# Altium PCB CH32H417MEU6-UHSIF-Bottom-R0.PcbDoc (part 2 of 2)
Units mm, origin at the board's own origin, x right, y up, seen from the top; angles counter-clockwise.
Board outline 65 x 45 mm, 4 copper layers (Top Layer, Layer 1, Layer 2, Bottom Layer), stack 0.603 mm thick; 56 components, 86 nets, 278 pads, 436 vias.
Unrouted connection lines stored in the file: 33.
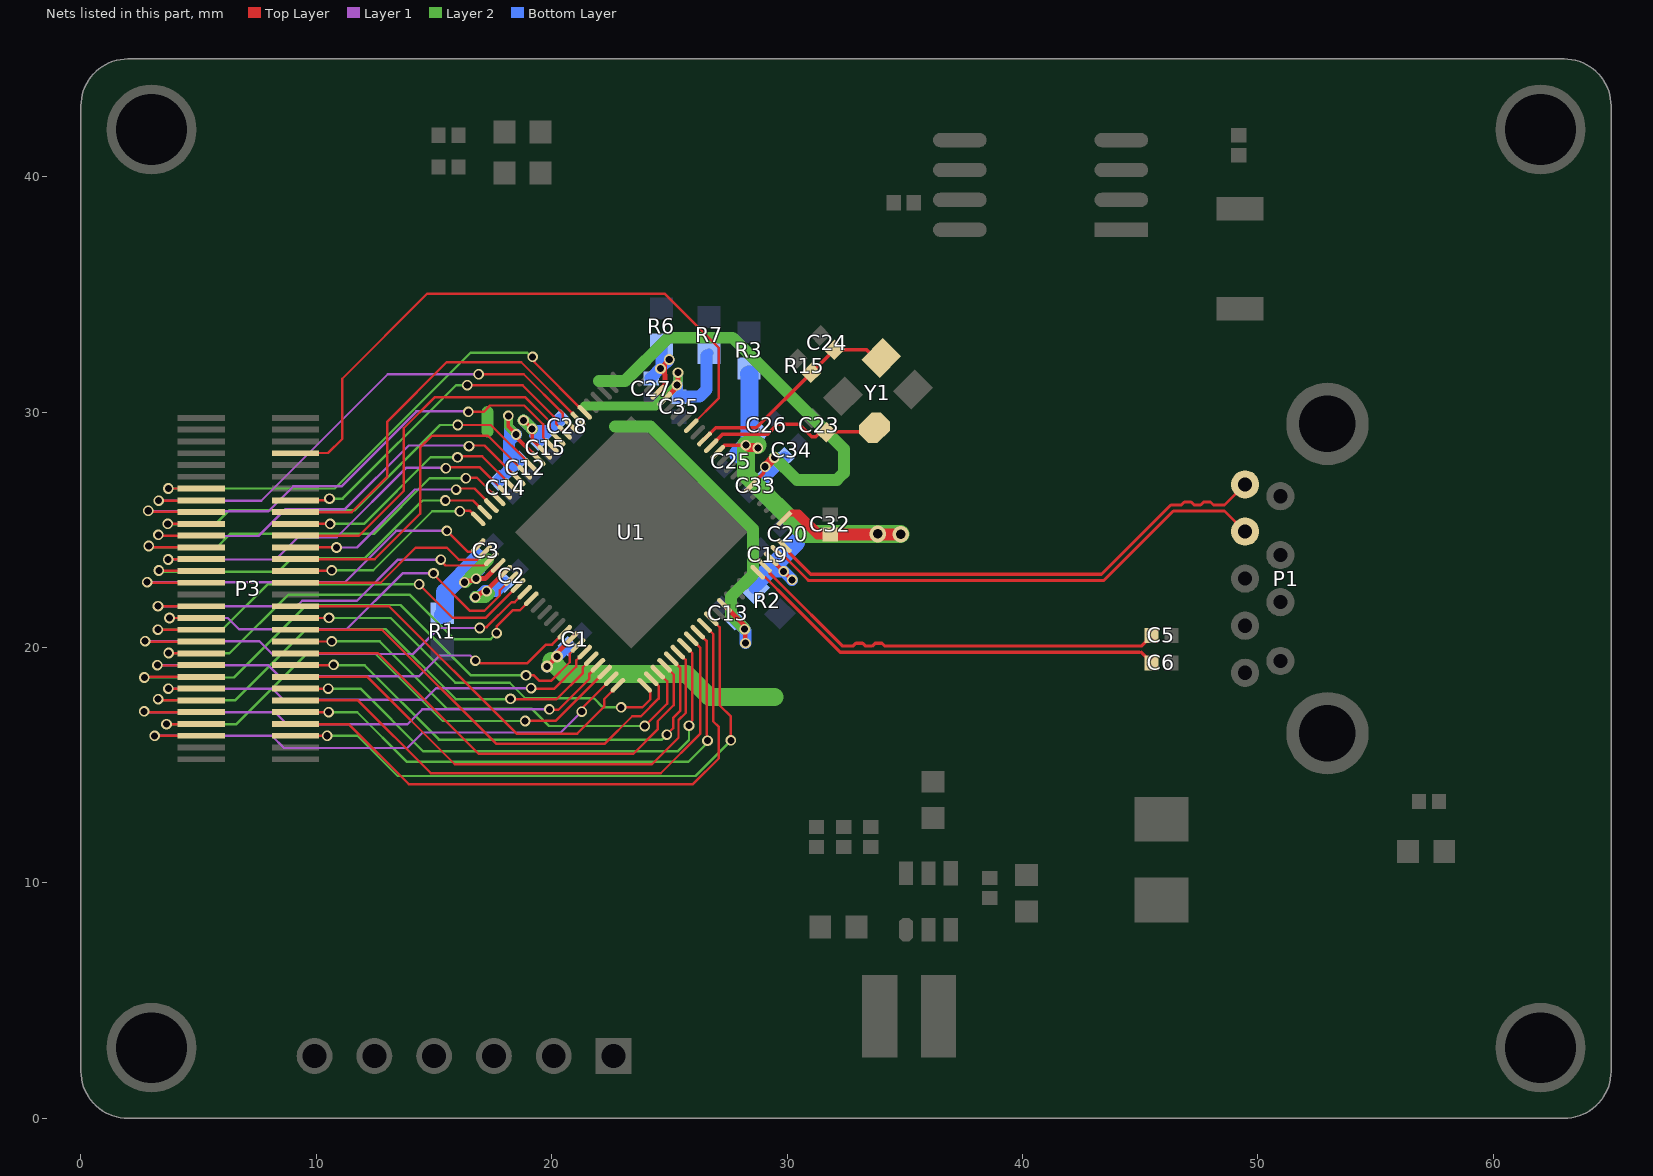
[diagram p4: the nets of this part, all layers, seen from the top]

## Via types
v1: diameter 0.45, hole 0.3, Top Layer to Bottom Layer, tented both sides, 329 vias
v2: diameter 0.5, hole 0.3, Top Layer to Bottom Layer, tented both sides, 85 vias
v3: diameter 0.6, hole 0.3, Top Layer to Bottom Layer, tented both sides, 12 vias
v4: diameter 0.711, hole 0.406, Top Layer to Bottom Layer, tented both sides, 10 vias

## Nets (pads, with @x,y where several pads share a name; then routed paths per layer and width w, separated by ;. In a path a pad name is that pad's centre, name@x,y a point inside that pad or via, vN(x,y) a via of type N, cw(c..) or ccw(c..) an arc to the next point about the centre after c; other vN are vias at no path point) (continued)
UFP7: P3.13 U1.28 | length 22.6
  Top Layer w0.102: v1(3.714,26.75) P3.13@5.112,26.75 ; v1(19.188,32.34) 19.255,32.274 19.255,32.129 U1.28@21.398,29.986
  Layer 2 w0.102: v1(3.714,26.75) 10.785,26.75 16.551,32.516 18.955,32.516 19.131,32.34 v1(19.188,32.34)
UFP8: P3.18 U1.29 | length 17
  Top Layer w0.102: P3.18@9.112,25.75 11.508,25.75 13.017,27.259 13.017,29.596 15.534,32.113 18.706,32.113 U1.29@21.115,29.703
UFP9: P3.15 U1.30 | length 22.6
  Top Layer w0.102: v1(3.304,26.237) 5.099,26.237 P3.15@5.112,26.25 ; v1(16.894,31.604) 18.809,31.604 20.475,29.939 20.475,29.778 U1.30@20.833,29.42
  Layer 1 w0.102: v1(3.304,26.237) 3.311,26.23 7.659,26.23 13.034,31.604 v1(16.894,31.604)
UFP10: P3.16 U1.31 | length 14.4
  Top Layer w0.102: P3.16@9.112,26.25 10.315,26.25 10.32,26.255 10.495,26.255 v1(10.561,26.322) ; v1(16.411,31.141) 18.762,31.141 20.195,29.707 20.195,29.492 U1.31@20.55,29.137
  Layer 2 w0.102: v1(10.561,26.322) 11.119,26.322 15.938,31.141 v1(16.411,31.141)
UFP11: P3.22 U1.32 | length 16.1
  Top Layer w0.102: P3.22@9.112,24.75 9.118,24.744 11.814,24.744 13.714,26.644 13.714,29.31 15.026,30.622 18.885,30.622 19.916,29.591 19.916,29.206 U1.32@20.267,28.855
UFP12: P3.17 U1.33 | length 22.3
  Top Layer w0.102: v1(2.862,25.807) 2.912,25.757 P3.17@5.105,25.757 ; v1(16.459,30.008) 17.111,30.008 17.382,30.279 18.833,30.279 19.636,29.476 19.636,28.919 U1.33@19.984,28.572
  Layer 1 w0.102: v1(2.862,25.807) 2.889,25.779 7.957,25.779 9.021,26.844 11.066,26.844 14.25,30.027 16.44,30.027 v1(16.459,30.008)
UFP13: P3.19 U1.36 | length 19.3
  Top Layer w0.102: v1(3.689,25.248) 3.691,25.25 P3.19@5.112,25.25 ; v1(16.006,29.449) 17.41,29.449 U1.36@19.136,27.723
  Layer 2 w0.102: v1(3.689,25.248) 3.714,25.223 5.695,25.223 6.307,25.835 11.642,25.835 15.256,29.449 v1(16.006,29.449)
UFP14: P3.26 U1.37 | length 14.2
  Top Layer w0.102: P3.26@9.112,23.75 12.48,23.75 14.41,25.681 14.41,28.486 14.92,28.996 17.286,28.996 18.842,27.44 U1.37@18.853,27.44
UFP15: P3.21 U1.38 | length 19.3
  Top Layer w0.102: v1(3.292,24.782) 3.324,24.75 P3.21@5.112,24.75 ; v1(16.487,28.548) 16.518,28.579 17.149,28.579 U1.38@18.57,27.158
  Layer 1 w0.102: v1(3.292,24.782) 3.339,24.735 7.545,24.735 8.688,25.878 11.225,25.878 13.926,28.579 16.457,28.579 v1(16.487,28.548)
UFP16: P3.20 U1.39 | length 10.9
  Top Layer w0.102: P3.20@9.112,25.25 v1(10.588,25.25) ; v1(15.998,28.076) 16.042,28.12 17.042,28.12 U1.39@18.287,26.875
  Layer 2 w0.102: v1(10.588,25.25) 12.022,25.25 14.849,28.076 v1(15.998,28.076)
UFP17: P3.25 U1.40 | length 17.8
  Top Layer w0.102: v1(3.707,23.735) 3.721,23.75 P3.25@5.112,23.75 ; v1(15.505,27.612) 15.538,27.646 16.95,27.646 U1.40@18.004,26.592
  Layer 1 w0.102: v1(3.707,23.735) 8.279,23.735 9.221,24.678 10.865,24.678 13.829,27.641 15.476,27.641 v1(15.505,27.612)
UFP18: P3.23 U1.41 | length 18.7
  Top Layer w0.102: v1(2.881,24.309) 2.926,24.264 5.098,24.264 P3.23@5.112,24.25 ; v1(16.354,27.188) 16.373,27.206 16.824,27.206 U1.41@17.721,26.309
  Layer 2 w0.102: v1(2.881,24.309) 2.94,24.25 5.768,24.25 6.339,24.821 12.451,24.821 14.814,27.184 15.682,27.184 15.685,27.188 v1(16.354,27.188)
UFP19: P3.24 U1.42 | length 9.7
  Top Layer w0.102: P3.24@9.112,24.25 10.852,24.25 v1(10.856,24.246) ; v1(15.938,26.707) 15.981,26.75 16.715,26.75 U1.42@17.439,26.026
  Layer 1 w0.102: v1(10.856,24.246) 11.721,24.246 14.183,26.707 v1(15.938,26.707)
UFP20: P3.27 U1.43 | length 17.1
  Top Layer w0.102: v1(3.313,23.269) 3.332,23.25 P3.27@5.112,23.25 ; v1(15.479,26.244) 16.655,26.244 U1.43@17.156,25.743
  Layer 2 w0.102: v1(3.313,23.269) 3.373,23.209 8.371,23.209 8.963,23.801 12.061,23.801 14.504,26.244 v1(15.479,26.244)
UFP21: P3.28 U1.44 | length 9
  Top Layer w0.102: P3.28@9.112,23.25 9.126,23.264 10.643,23.264 v1(10.656,23.277) ; v1(16.101,25.784) 16.116,25.799 16.534,25.799 U1.44@16.873,25.46
  Layer 2 w0.102: v1(10.656,23.277) 12.418,23.277 14.925,25.784 v1(16.101,25.784)
UFP22: P3.29 U1.45 | length 17.8
  Top Layer w0.102: v1(2.811,22.773) 2.833,22.75 P3.29@5.112,22.75 ; v1(15.544,24.953) 16.44,24.058 16.575,24.058 16.846,24.329 U1.45@16.873,24.329
  Layer 1 w0.102: v1(2.811,22.773) 2.818,22.765 11.209,22.765 13.397,24.953 v1(15.544,24.953)
UFP23: P3.30 U1.46 | length 9
  Top Layer w0.102: P3.30@9.112,22.75 12.737,22.75 14.219,24.232 15.547,24.232 16.056,23.723 16.833,23.723 U1.46@17.156,24.046
UFP24: P3.33 U1.47 | length 17.1
  Top Layer w0.102: v1(3.273,21.756) 3.278,21.75 P3.33@5.112,21.75 ; v1(15.292,23.733) 15.292,23.677 15.489,23.481 17.129,23.481 17.412,23.763 U1.47@17.439,23.763
  Layer 1 w0.102: v1(3.273,21.756) 9.169,21.756 9.4,21.986 11.724,21.986 13.471,23.733 v1(15.292,23.733)
UFP25: P3.35 U1.50 | length 18.4
  Top Layer w0.102: v1(3.762,21.25) P3.35@5.112,21.25 ; v1(14.978,23.148) 14.978,23.107 16.533,21.553 17.134,21.553 17.8,22.219 17.8,22.427 U1.50@18.287,22.915
  Layer 1 w0.102: v1(3.762,21.25) 6.238,21.25 6.719,20.77 11.289,20.77 13.667,23.148 v1(14.978,23.148)
UFP26: P3.37 U1.51 | length 19.1
  Top Layer w0.102: v1(3.266,20.759) 3.275,20.75 P3.37@5.112,20.75 ; v1(14.367,22.685) 15.796,21.256 17.194,21.256 18.079,22.141 U1.51@18.57,22.632
  Layer 2 w0.102: v1(3.266,20.759) 3.275,20.75 5.999,20.75 7.927,22.678 14.361,22.678 v1(14.367,22.685)
UFP27: P3.39 U1.52 | length 19.8
  Top Layer w0.102: v1(2.729,20.268) 2.747,20.25 P3.39@5.112,20.25 ; v1(16.941,20.825) 16.979,20.863 17.234,20.863 18.291,21.919 18.423,21.919 U1.52@18.853,22.349
  Layer 1 w0.102: v1(2.729,20.268) 7.578,20.268 8.126,19.72 14.104,19.72 15.209,20.825 v1(16.941,20.825)
UFP28: P3.41 U1.53 | length 19.5
  Top Layer w0.102: v1(3.728,19.764) 3.742,19.75 P3.41@5.112,19.75 ; v1(17.659,20.609) 17.671,20.621 17.671,20.905 18.339,21.573 18.642,21.573 U1.53@19.136,22.066
  Layer 2 w0.102: v1(3.728,19.764) 3.742,19.75 6.31,19.75 8.795,22.234 13.981,22.234 15.859,20.356 17.406,20.356 v1(17.659,20.609)
UFP29: P3.43 U1.58 | length 20.4
  Top Layer w0.102: v1(3.249,19.246) 3.263,19.232 5.094,19.232 P3.43@5.112,19.25 ; v1(16.757,19.441) 16.843,19.441 16.962,19.321 18.951,19.321 19.749,20.12 20.017,20.12 U1.58@20.55,20.652
  Layer 1 w0.102: v1(3.249,19.246) 3.253,19.25 7.954,19.25 8.433,18.772 14.354,18.772 15.241,19.658 16.54,19.658 v1(16.757,19.441)
UFP30: P3.45 U1.60 | length 24.3
  Top Layer w0.102: v1(2.694,18.723) 2.721,18.75 P3.45@5.112,18.75 ; v1(18.906,18.815) 19.245,18.815 19.482,18.577 19.973,18.577 20.763,19.367 20.763,19.734 U1.60@21.115,20.086
  Layer 2 w0.102: v1(2.694,18.723) 6.501,18.723 9.581,21.804 13.577,21.804 16.566,18.815 v1(18.906,18.815)
UFP31: P3.47 U1.61 | length 20.3
  Top Layer w0.102: v1(3.715,18.253) 3.718,18.25 P3.47@5.112,18.25 ; v1(19.122,18.268) 19.149,18.242 20.101,18.242 21.043,19.183 21.043,19.448 U1.61@21.398,19.804
  Layer 1 w0.102: v1(3.715,18.253) 3.719,18.249 8.135,18.249 8.603,17.781 14.597,17.781 15.084,18.268 v1(19.122,18.268)
UFP32: P3.49 U1.62 | length 23.6
  Top Layer w0.102: v1(3.279,17.801) 3.33,17.75 P3.49@5.112,17.75 ; v1(18.248,17.816) 18.264,17.8 20.201,17.8 21.322,18.921 21.322,19.162 U1.62@21.681,19.521
  Layer 2 w0.102: v1(3.279,17.801) 3.33,17.75 6.551,17.75 9.585,20.785 12.946,20.785 15.931,17.8 18.232,17.8 v1(18.248,17.816)
UFP33: P3.51 U1.63 | length 23.1
  Top Layer w0.102: v1(2.687,17.283) 2.72,17.25 P3.51@5.112,17.25 ; v1(19.898,17.369) 19.913,17.353 20.287,17.353 21.602,18.667 21.602,18.875 U1.63@21.964,19.238
  Layer 1 w0.102: v1(2.687,17.283) 2.72,17.25 8.242,17.25 8.763,16.729 13.86,16.729 14.499,17.369 v1(19.898,17.369)
UFP34: P3.53 U1.64 | length 23.4
  Top Layer w0.102: v1(3.636,16.743) 5.105,16.743 P3.53@5.112,16.75 ; v1(18.871,16.874) 18.888,16.891 20.183,16.891 U1.64@22.247,18.955
  Layer 2 w0.102: v1(3.636,16.743) 6.609,16.743 9.606,19.74 12.502,19.74 15.369,16.874 v1(18.871,16.874)
UFP35: P3.55 U1.65 | length 22.9
  Top Layer w0.102: v1(3.131,16.247) 3.134,16.25 P3.55@5.112,16.25 ; v1(21.274,17.276) 21.341,17.342 21.341,17.463 22.53,18.652 U1.65@22.53,18.672
  Layer 1 w0.102: v1(3.131,16.247) 8.105,16.247 8.621,15.731 13.864,15.731 14.52,16.386 20.384,16.386 v1(21.274,17.276)
UFP36: P3.34 U1.66 | length 17
  Top Layer w0.102: P3.34@9.112,21.75 13.093,21.75 18.505,16.337 21.082,16.337 22.23,17.486 22.23,17.807 U1.66@22.813,18.389
UFP37: P3.36 U1.67 | length 17.5
  Top Layer w0.102: P3.36@9.112,21.25 9.114,21.252 v1(10.537,21.253) v1(10.537,21.253) ; v1(22.946,17.455) 23.843,17.455 24.189,17.801 24.189,18.074 24.175,18.089 24.175,18.158 U1.67@23.944,18.389
  Layer 2 w0.102: v1(10.537,21.253) 10.54,21.25 13.16,21.25 15.909,18.501 18.217,18.501 18.877,17.84 21.79,17.84 22.175,17.455 v1(22.946,17.455)
UFP38: P3.38 U1.68 | length 19.2
  Top Layer w0.102: P3.38@9.112,20.75 12.796,20.75 17.632,15.914 22.261,15.914 23.423,17.076 23.787,17.076 24.54,17.829 24.54,18.359 U1.68@24.227,18.672
UFP39: P3.40 U1.69 | length 19.2
  Top Layer w0.102: P3.40@9.112,20.25 9.116,20.254 10.651,20.254 v1(10.655,20.257) ; v1(23.952,16.662) 24.905,17.615 24.905,18.56 U1.69@24.51,18.955
  Layer 2 w0.102: v1(10.655,20.257) 12.691,20.257 15.561,17.387 19.161,17.387 19.886,16.662 v1(23.952,16.662)
UFP40: P3.42 U1.70 | length 20.8
  Top Layer w0.102: P3.42@9.112,19.75 12.622,19.75 16.888,15.483 23.468,15.483 24.499,16.514 24.499,16.863 25.184,17.548 25.184,18.846 U1.70@24.792,19.238
UFP41: P3.44 U1.71 | length 20.8
  Top Layer w0.102: P3.44@9.112,19.25 10.723,19.25 v1(10.735,19.261) ; v1(24.888,16.296) 25.157,16.565 25.157,17.009 25.464,17.316 25.464,19.133 U1.71@25.075,19.521
  Layer 2 w0.102: v1(10.735,19.261) 10.754,19.242 12.052,19.242 15.208,16.087 24.678,16.087 v1(24.888,16.296)
UFP42: P3.46 U1.72 | length 22.2
  Top Layer w0.102: P3.46@9.112,18.75 12.171,18.75 15.883,15.038 24.26,15.038 25.386,16.164 25.386,16.915 25.692,17.221 25.692,19.47 U1.72@25.358,19.804
UFP43: P3.48 U1.73 | length 22.3
  Top Layer w0.102: P3.48@9.126,18.236 P3.48@9.112,18.25 v1(10.505,18.25) ; U1.73@25.641,20.086 25.974,19.753 25.974,16.909 25.829,16.764 v1(25.829,16.675)
  Layer 2 w0.102: v1(10.505,18.25) 11.875,18.25 14.54,15.585 25.342,15.585 25.829,16.072 v1(25.829,16.675)
UFP44: P3.50 U1.74 | length 23.4
  Top Layer w0.102: P3.50@9.112,17.75 11.771,17.75 14.865,14.656 24.628,14.656 26.302,16.329 26.302,19.991 U1.74@25.924,20.369
UFP45: P3.52 U1.75 | length 23.6
  Top Layer w0.102: P3.52@9.114,17.252 P3.52@9.112,17.25 v1(10.525,17.25) ; U1.75@26.207,20.652 26.581,20.278 26.581,16.077 v1(26.619,16.039)
  Layer 2 w0.102: v1(10.525,17.25) 11.737,17.25 13.851,15.136 25.801,15.136 26.619,15.953 v1(26.619,16.039)
UFP46: P3.54 U1.76 | length 25.4
  Top Layer w0.102: P3.54@9.112,16.75 P3.54@9.114,16.748 ; P3.54@9.114,16.733 11.388,16.733 13.928,14.192 25.998,14.192 27.099,15.293 27.099,16.614 26.861,16.852 26.861,20.564 U1.76@26.489,20.935
UFP47: P3.56 U1.77 | length 25.4
  Top Layer w0.102: P3.56@9.112,16.25 v1(10.457,16.25) ; U1.77@26.772,21.218 27.14,20.85 27.14,17.535 27.612,17.063 v1(27.612,16.049)
  Layer 2 w0.102: v1(10.457,16.25) 11.749,16.25 13.46,14.539 26.101,14.539 v1(27.612,16.049)
UFPCLK: P3.8 U1.15 | length 27
  Top Layer w0.102: P3.8@9.112,28.25 9.123,28.261 10.503,28.261 11.102,28.86 11.102,31.416 14.715,35.03 24.784,35.03 27.099,32.715 27.099,30.596 U1.15@25.924,29.42
USB_SSRX_n: P1.6 U1.87 | length 21.9
  Top Layer w0.13: U1.87@29.601,24.046 29.826,23.821 29.928,23.821 30.821,22.927 30.896,22.852 43.459,22.852 46.402,25.796 48.58,25.796 P1.6@49.452,24.924
USB_SSRX_p: P1.5 U1.88 | length 21.9
  Top Layer w0.13: U1.88@29.884,24.329 30.109,24.103 30.109,24.002 31.003,23.109 43.353,23.109 46.296,26.052 46.744,26.052 46.871,26.178 47.163,26.178 47.29,26.052 47.567,26.052 47.693,26.178 47.986,26.178 48.112,26.052 48.58,26.052 P1.5@49.452,26.924
USB_SSTX_n: C6.1 U1.84 | length 18.3
  Top Layer w0.13: U1.84@28.752,23.198 28.978,22.972 29.079,22.972 29.55,22.502 29.603,22.448 32.256,19.796 44.97,19.796 ; 45.045,19.796 45.476,19.365 C6.1@45.476,19.34
USB_SSTX_p: C5.1 U1.85 | length 18.3
  Top Layer w0.13: U1.85@29.035,23.481 29.261,23.255 29.261,23.154 29.656,22.758 32.362,20.052 32.791,20.052 32.918,20.178 33.21,20.178 33.337,20.052 33.614,20.052 33.74,20.178 34.033,20.178 34.159,20.052 45.042,20.052 ; 45.045,20.052 45.476,20.483 C5.1@45.476,20.508
VDD12A: C19.2 C20.2 R2.1 U1.86 | length 5.8
  Top Layer w0.178: U1.86@29.318,23.763 v1(29.853,23.229) v1(30.212,22.87)
  Bottom Layer w0.508: R2.1@28.608,22.518 R2.1@28.608,22.787 ; 29.067,23.139 29.157,23.229 v1(29.853,23.229) ; C19.2@29.466,23.646 29.418,23.598 29.483,23.598 v1(29.853,23.229) ; v1(30.212,22.87) v1(29.853,23.229)
  Bottom Layer w0.762: R2.1@28.662,22.734 29.067,23.139 ; 29.157,23.229 C19.2@29.472,23.544 ; C19.2@29.52,23.592 C20.2@30.383,24.455
VDD33: C1.1 C25.2 C26.2 C32.2 R3.1 U1.1 U1.11 U1.59 | length 37
  Top Layer w0.152: U1.11@27.055,28.289 27.362,28.596 v1(28.244,28.596)
  Top Layer w0.203: v2@19.833,19.251 19.857,19.251 v2(20.22,19.615) ; U1.59@20.833,20.369 20.277,19.814 v2@20.277,19.588 ; C32.2@31.543,24.691 31.267,24.691 30.288,25.67 ; C32.2@31.595,24.954 31.332,24.954 30.518,25.768 30.194,25.768 U1.1@30.096,25.67 ; C32.2@31.829,24.804 31.331,24.804 30.464,25.67 30.288,25.67 ; v2@20.276,19.587 v2@20.277,19.588 ; U1.1@30.096,25.67 30.288,25.67 ; U1.1@30.096,25.67 30.093,25.67 U1.1@29.884,25.46 29.886,25.46 U1.1@30.096,25.67
  Top Layer w0.381: v1(28.244,28.596) 28.263,28.596 28.375,28.484 28.743,28.484 v1(28.756,28.47)
  Top Layer w0.508: C32.2@31.829,24.804 32.998,24.804 34.82,24.804 v4(34.826,24.81)
  Layer 2 w0.762: 19.985,19.425 20.532,18.878 25.721,18.878 26.703,17.896 29.466,17.896 ; v1@28.744,28.596 v1(28.244,28.596) 28.244,27.351 30.773,24.821 v4(33.847,24.821) v4@34.812,24.821
  Bottom Layer w0.508: v2(19.796,19.19) 20.652,20.047 C1.1@20.692,20.047
  Bottom Layer w0.762: C25.2@27.919,28.217 28.405,28.703 28.405,31.588 R3.1@28.387,31.606
VDD33A: C27.2 R6.1 U1.20 | length 4.4
  Top Layer w0.203: U1.20@24.51,30.834 24.811,31.136 24.811,31.587 24.791,31.607 ; 24.791,32.012 24.791,31.607 ; v1@24.978,32.313 24.978,32.223 24.621,31.866 v1(24.621,31.843) 24.621,31.776 24.791,31.607
  Bottom Layer w0.508: C27.2@24.202,31.442 v1@24.659,31.9 ; v1(24.621,31.843) 24.659,31.881 v1@24.659,31.9 ; R6.1@24.659,32.864 v1@24.659,31.9 ; v1@24.966,32.207 v1@24.659,31.9
  other v1: 24.991,32.232
VDDIO: C12.1 C14.1 C35.2 R7.1 U1.19 U1.35 | length 19.3
  Top Layer w0.152: v1(18.155,29.839) 18.155,29.382 18.488,29.049 v1(18.488,29.046) ; v1@18.489,29.047 18.546,28.99 18.546,28.878 U1.35@19.418,28.006
  Top Layer w0.203: U1.19@25.003,30.763 25.325,31.084 25.325,31.176 25.372,31.224 25.369,31.227 25.369,31.673 v1(25.365,31.677)
  Layer 2 w0.381: v1(18.155,29.839) 18.168,29.826 18.168,29.605 18.168,29.384 18.488,29.064 v1(18.488,29.046) ; 21.397,30.258 24.407,30.258 25.372,31.223 25.369,31.227 25.369,31.673 v1(25.365,31.677)
  Bottom Layer w0.381: v1(18.155,29.839) 18.168,29.826 18.168,29.384 ; 18.192,28.33 18.168,28.354 18.168,29.384 ; v1(18.488,29.046) 18.488,29.064 18.168,29.384 ; v1@25.365,31.07 v1(25.365,31.677) ; v1@25.372,31.223 25.385,31.21 25.385,30.673 C35.2@25.408,30.651 ; R7.1@26.576,32.394 R7.1@26.685,32.503
  Bottom Layer w0.508: v1(18.488,29.046) 18.192,28.75 18.192,28.33 ; C35.2@25.408,30.651 26.278,30.651 26.576,30.949 R7.1@26.576,32.394 ; 18.192,28.33 18.192,27.526 C14.1@17.756,27.089 C12.1@18.594,27.928 18.192,28.33
  other v1: 25.321,31.147
VDDK: C3.2 C33.2 C34.2 R1.1 U1.6 U1.48 | length 28.3
  Top Layer w0.152: U1.6@28.469,26.875 29.007,27.413 29.007,27.618 v1(29.064,27.675)
  Top Layer w0.203: v1@16.344,22.787 16.391,22.834 16.635,22.834 16.724,22.924 v1(16.791,22.924) 17.165,22.924 U1.48@17.721,23.481
  Top Layer w0.381: v1(29.064,27.675) v1(29.459,28.07)
  Layer 2 w0.508: v1@16.344,22.787 16.636,23.079 17.292,23.735 ; 17.265,29.164 17.265,29.459 17.265,29.993 ; 22.004,31.318 23.113,31.318 24.951,33.156 27.687,33.156 32.413,28.43 32.413,27.415 32.115,27.118 30.411,27.118 v1(29.459,28.07)
  Bottom Layer w0.508: v1@16.66,23.055 16.924,23.318 16.924,23.714 16.942,23.732 16.942,23.797 C3.2@16.924,23.815 ; C33.2@28.972,27.163 C34.2@29.887,28.078
  Bottom Layer w0.762: R1.1@15.375,21.367 15.457,21.448 15.457,22.348 C3.2@16.888,23.779
  other v1: 16.29,22.769
VIO18: C2.1 C13.1 C15.2 C28.2 U1.34 U1.49 U1.79 | length 25
  Top Layer w0.152: v1(18.801,29.647) 18.804,29.647 19.167,29.285 v1(19.17,29.285) 19.17,28.82 U1.34@19.701,28.289
  Top Layer w0.203: v1(16.758,22.136) 16.825,22.136 17.034,22.345 17.184,22.345 v1(17.231,22.393) 17.231,22.422 18.004,23.195 U1.49@18.004,23.198 ; U1.79@27.338,21.784 v1@28.15,20.972 ; v1(28.197,20.781) 28.15,20.828 v1@28.15,20.972 ; v1(28.232,20.18) 28.22,20.193 28.22,20.902 v1@28.15,20.972
  Layer 2 w0.508: v1(16.758,22.136) 17.181,22.136 v1@17.334,22.29 ; v1(18.801,29.647) 18.807,29.647 v1(19.17,29.285) ; 22.683,29.378 24.198,29.378 28.55,25.026 28.55,23.087 27.61,22.147 27.61,21.368 v1(28.197,20.781)
  Bottom Layer w0.508: v1(16.758,22.136) 16.903,22.136 17.16,22.393 v1(17.231,22.393) 17.643,22.393 C2.1@17.994,22.744 ; v1(18.801,29.647) 18.982,29.466 18.989,29.466 v1(19.17,29.285) v1@19.257,29.198 ; C15.2@19.449,28.782 C15.2@19.466,28.8 ; C28.2@20.355,29.689 19.865,29.198 ; C13.1@27.802,21.158 v1@28.18,20.781 ; v1(28.197,20.781) v1@28.18,20.781 ; v1(28.232,20.18) 28.232,20.729 28.188,20.772 v1@28.18,20.781 ; v1@19.257,29.198 19.865,29.198 ; v1@19.257,29.198 19.296,29.159 19.296,29.035 19.466,28.865 C15.2@19.466,28.8 ; C15.2@19.466,28.8 19.865,29.198
XI: C23.2 U1.12 Y1.1 | length 7.7
  Top Layer w0.152: U1.12@26.772,28.572 27.25,29.049 29.15,29.049 29.582,29.481 30.519,29.481 31.048,28.951 31.214,28.951 31.358,29.096 31.507,29.096 31.566,29.155 33.542,29.155 Y1.1@33.716,29.329
XO: C24.2 R15.2 U1.13 Y1.3 | length 9.2
  Top Layer w0.152: U1.13@26.489,28.855 26.964,29.329 28.694,29.329 R15.2@31.026,31.66 C24.2@32.014,32.648 32.031,32.666 32.348,32.666 32.365,32.648 33.374,32.648 33.723,32.299 Y1.3@33.999,32.299
pads on no net: ?.0 U1.7 U1.8 U1.9 U1.10 U1.21 U2.1

## Polygon pours and split planes (outlines as drawn)
GND on Layer 2 "GND" (solid, remove dead copper, pour order 22): 0,-0.214 65,-0.214 65,43 ccw(c63,43) 63,45 2,45 ccw(c2,43) 0,43
+5V on Layer 2 "+5V" (solid, remove dead copper, pour order 15): 47.124,15.754 47.124,11.591 47.372,11.343 51.333,11.343 51.583,11.561 51.583,16.913 52.635,17.947 52.635,19.504 52.012,20.127 50.38,20.127 50.251,19.998 50.251,18.881
VIO18 on Layer 2 "VIO18" (solid, remove dead copper, pour order 14): 18.985,26.508 21.498,29.021 24.056,29.021 28.139,24.938 28.139,23.8 27.202,22.863 27.202,20.346 27.597,19.951 28.321,19.951 28.528,20.158 28.528,22.198 29.106,22.776 29.106,25.451 24.825,29.732 19.361,29.732 19.025,30.067 18.676,30.067 18.39,29.782 18.39,29.71 18.413,29.536 19.013,28.936 19.029,28.491 18.004,27.466 18.004,22.632 17.814,22.442 16.468,22.442 16.362,22.335 16.362,21.839 16.482,21.718 18.595,21.718 18.985,22.108
VDDK on Layer 2 "VDDK" (solid, remove dead copper, pour order 12): 15.96,22.724 15.96,23.114 16.272,23.426 16.869,23.426 16.932,23.488 16.932,27.834 16.932,30.973 17.886,31.927 23.224,31.927 24.905,33.608 28.448,33.608 32.905,29.15 32.905,26.773 32.858,26.725 29.775,26.725 28.788,27.712 28.772,27.804 28.772,27.931 29.28,28.439 29.835,28.439 30.675,27.599 31.221,27.599 31.502,27.879 31.502,28.563 27.437,32.629 24.927,32.629 23.234,30.936 21.657,30.936 21.521,31.073 18.356,31.073 17.801,30.518 17.801,28.156 17.801,23.101 17.294,22.594 16.09,22.594
VDD33 on Layer 2 "VDD33" (solid, remove dead copper, pour order 10): 32.406,19.86 32.406,22.289 32.958,22.84 34.882,22.84 35.208,23.166 35.208,25.027 35.087,25.148 31.124,25.148 28.772,27.499 28.772,28.108 28.823,28.159 28.905,28.159 29.184,28.437 29.184,29.046 29.039,29.192 27.612,29.192 27.523,29.103 27.523,27.287 30.944,23.866 30.944,20.309 29.298,18.664 27.02,18.664 25.963,19.721 21.164,19.721 20.98,19.905 19.57,19.905 19.517,19.852 19.517,18.862 19.977,18.402 25.412,18.402 26.564,17.249 29.796,17.249
VDDIO on Layer 2 "VDDIO" (solid, remove dead copper, pour order 13): 18.036,28.505 18.748,28.505 18.878,28.636 18.878,29.03 18.467,29.441 18.467,29.801 18.85,30.184 20.59,30.184 20.851,29.924 24.818,29.924 25.748,30.854 25.748,31.769 25.582,31.934 25.213,31.934 25.045,31.766 25.045,31.416 24.402,30.773 21.568,30.773 21.487,30.854 18.369,30.854 17.887,30.372 17.887,28.577
GND on Bottom Layer "GND" (solid, remove dead copper, pour order 23): 0,-0.136 65,-0.136 65,43 ccw(c63,43) 63,45 2,45 ccw(c2,43) 0,43
1V2 on Bottom Layer "1V2" (solid, remove dead copper, pour order 11): 30.633,7.146 14.276,7.146 14.064,7.358 14.064,20.323 14.132,20.391 15.892,20.391 16.002,20.28 16.002,10.967 16.28,10.689 28.689,10.689 30.087,12.087 30.087,20.263 29.109,21.242 29.109,21.497 29.682,22.07 30.451,22.07 31.95,20.572 31.95,10.454 30.751,9.255 30.751,7.264
3V3 on Bottom Layer "3V3" (solid, remove dead copper, pour order 16): 35.836,37.725 36.475,37.086 36.475,12.241 36.692,12.024 38.008,12.024 38.408,12.424 38.408,40.137 37.675,40.87 21.346,40.87 20.219,39.742 18.921,38.496 11.651,38.496 11.529,38.337 11.529,32.627 11.238,32.335 3.818,32.335 3.298,31.815 3.298,29.769 3.443,29.623 13.506,29.623 13.794,29.862 13.794,35.695 14.189,36.072 20.056,36.072 21.35,37.367 23.707,37.367 24.122,36.952 24.122,34.126 24.309,33.938 25.829,33.938 26.208,33.559 27.515,33.559 28.101,32.973 29.023,32.973 29.186,33.136 29.186,34.042 28.562,34.667 26.245,34.667 25.788,35.123 25.205,35.123 25.134,35.193 25.134,37.367 25.493,37.725
GND on Top Layer "GND" (solid, remove dead copper, pour order 20): 0,-0.136 65,-0.136 65,43 ccw(c63,43) 63,45 2,45 ccw(c2,43) 0,43
3V3 on Top Layer "3V3" (solid, remove dead copper, pour order 8): 10.153,29.619 3.832,29.619 3.204,30.247 3.204,32.236 3.28,32.312 4.131,32.312 4.356,32.086 4.356,30.597 4.807,30.146 10.038,30.146 10.153,30.031
GND on Layer 1 "GND" (solid, remove dead copper, pour order 21): 0,0.097 65,0.097 65,43 ccw(c63,43) 63,45 2,45 ccw(c2,43) 0,43

## Keep-outs
Keep-Out Layer:
  the board outline again, w0.254

## Other copper
Top Layer:
  rectangle net GND: 7.463,28.576 10.493,29.356
  pour cut-out: 33.615,6.192 33.615,2.459 36.975,2.459 36.975,6.182
  region net +5V: 43.501,13.816 49.646,13.816 49.988,13.473 49.988,11.652 49.74,11.403 44.121,11.403 42.607,9.889 36.841,9.889 36.645,9.958 36.645,11.05 36.726,11.13 37.071,11.13 37.68,11.74 41.425,11.74
  region net 3V3: 35.76,9.949 36.247,9.949 36.301,10.002 36.301,11.737 36.651,12.087 37.982,12.087 38.089,12.193 38.089,13.228 38.096,13.236 37.944,13.388 35.806,13.388 35.692,13.274 35.692,9.987
  region net NetL2_1: 36.692,8.42 36.692,7.301 35.891,6.501 35.891,3.098 36.162,2.827 37.304,2.827 37.799,3.322 37.799,8.349 37.669,8.479 36.803,8.479
  region net 1V2: 29.747,9.101 31.772,9.101 31.878,8.995 31.878,6.315 32.163,6.029 34.316,6.029 34.522,5.824 34.522,3.552 34.406,3.437 29.901,3.437 29.644,3.693 29.644,8.981
  pour cut-out: 23.363,31.055 17.13,24.822 23.286,18.667 29.485,24.866
  region net GND: 7.969,29.361 7.819,29.212 7.819,28.629 8.234,28.629 8.308,28.684 8.308,29.361
  pour cut-out: 38.66,15.517 31.901,15.517 28.587,18.831 28.587,21.422 27.594,22.415 27.594,22.993 29.513,24.912 43.236,24.912 46.654,28.329 51.834,28.334 55.118,25.05 55.118,19.506 51.121,15.509 50.857,15.509
Layer 1:
  region net GND: 18.032,25.38 23.481,19.931 28.632,25.083 23.184,30.531
Layer 2:
  region net GND: 23.199,28.61 23.836,28.61 27.843,24.603 27.843,24.392 27.822,24.392 23.697,20.267 23.478,20.267 20.091,23.654 20.091,24.287 19.663,24.715 19.663,25.17 20.426,25.933
Bottom Layer:
  region net GND: 23.882,29.113 27.742,25.253 27.742,24.791 23.493,20.542 22.668,20.542 19.136,24.075 19.136,25.286 23.333,29.483

## Silkscreen, mask and mechanical layers (free items; w line width, h text height)
Top Overlay:
  text "RESET" at 52.374,34.219 h0.89 r90
  text "SWCLK" at 19.486,8.634 h0.89 r270
  text "SWDIO" at 16.927,8.486 h0.89 r270
  text "3V3" at 11.809,6.857 h0.89 r270
  text "GND" at 14.368,6.857 h0.89 r270
  text "TX6" at 22.045,6.857 h0.89 r270
  text "5V" at 9.249,5.968 h0.89 r270
  text "CH32H417MEU6-UHSIF-Bottom-R0-1v2" at 29.785,0.68 h0.89
Mechanical 1:
  the board outline again, w0.254

## Text inside footprints (layer, text, board x,y; h text height)
LED1: Top Overlay "+" at 58.88,11.614 h1.02 r270
LED2: Top Overlay "+" at 20.495,42.171 h1.02 r270
LED3: Top Overlay "+" at 20.495,40.427 h1.02 r270
P1: Bottom Overlay "T+" at 51.994,19.297 h0.8 r180; Bottom Overlay "T-" at 51.994,21.227 h0.8 r180; Bottom Overlay "G" at 51.994,23.31 h0.8 r180; Bottom Overlay "R+" at 51.994,25.393 h0.8 r180; Bottom Overlay "R-" at 51.994,27.196 h0.8 r180; Bottom Overlay "G" at 54.254,26.739 h0.8 r180; Bottom Overlay "D+" at 54.254,24.199 h0.8 r180; Bottom Overlay "D-" at 54.254,22.167 h0.8 r180; Bottom Overlay "V" at 54.254,19.83 h0.8 r180